# EAGLE board registerA (EAGLE 9.6.2)
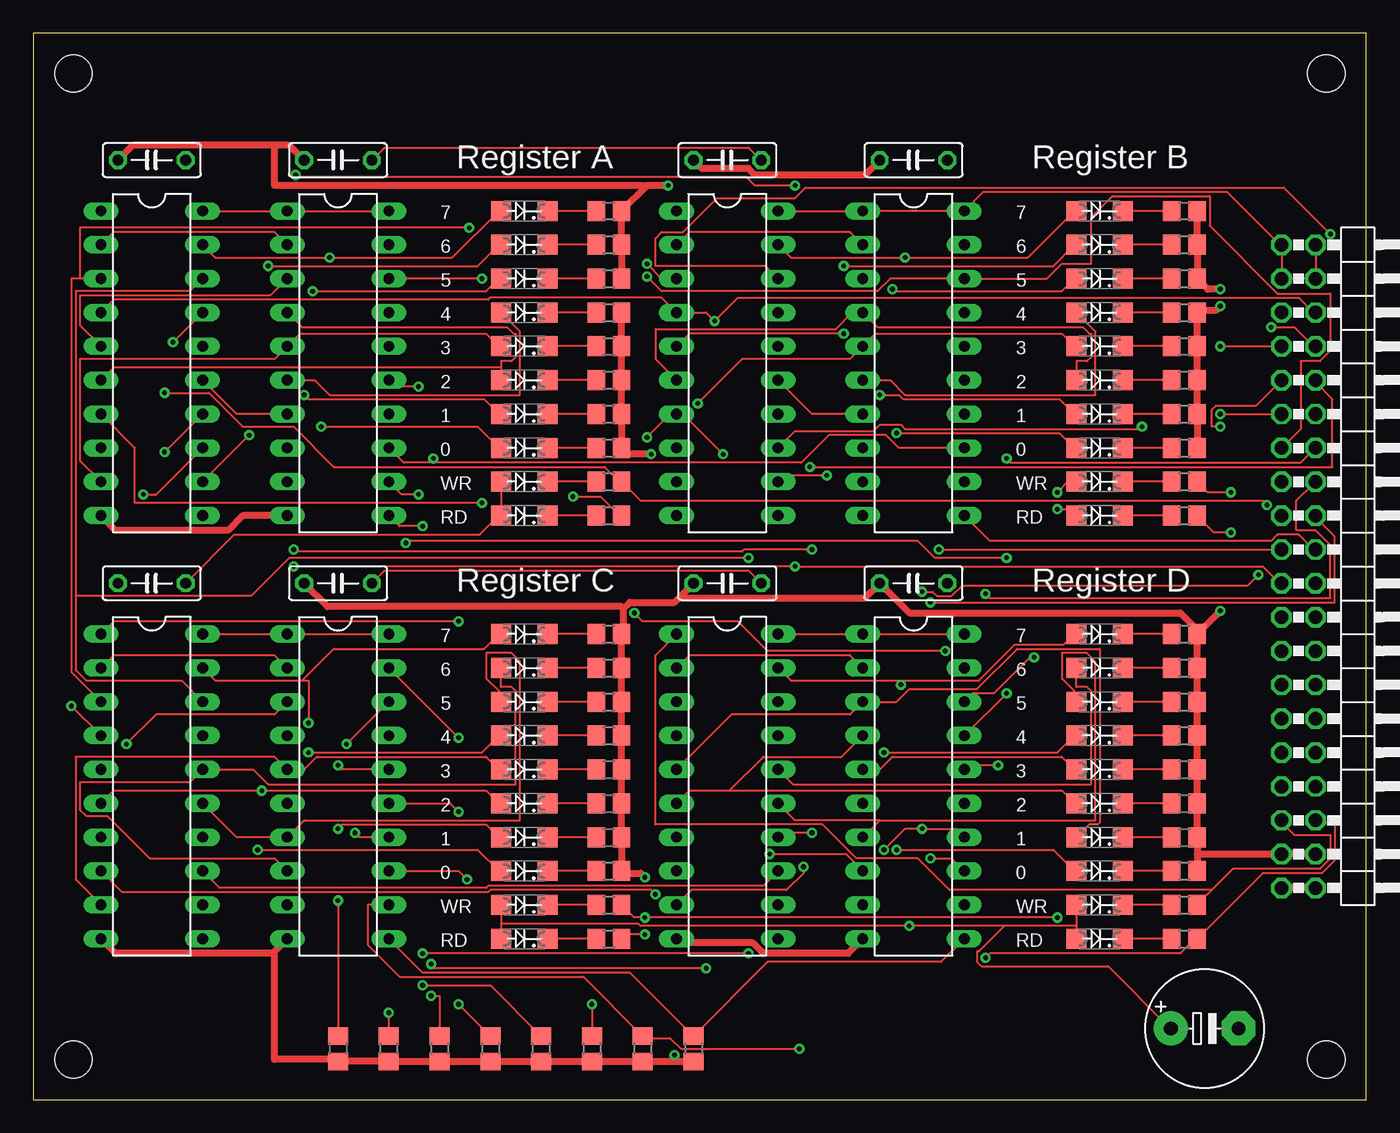
[diagram p0: board, top side]
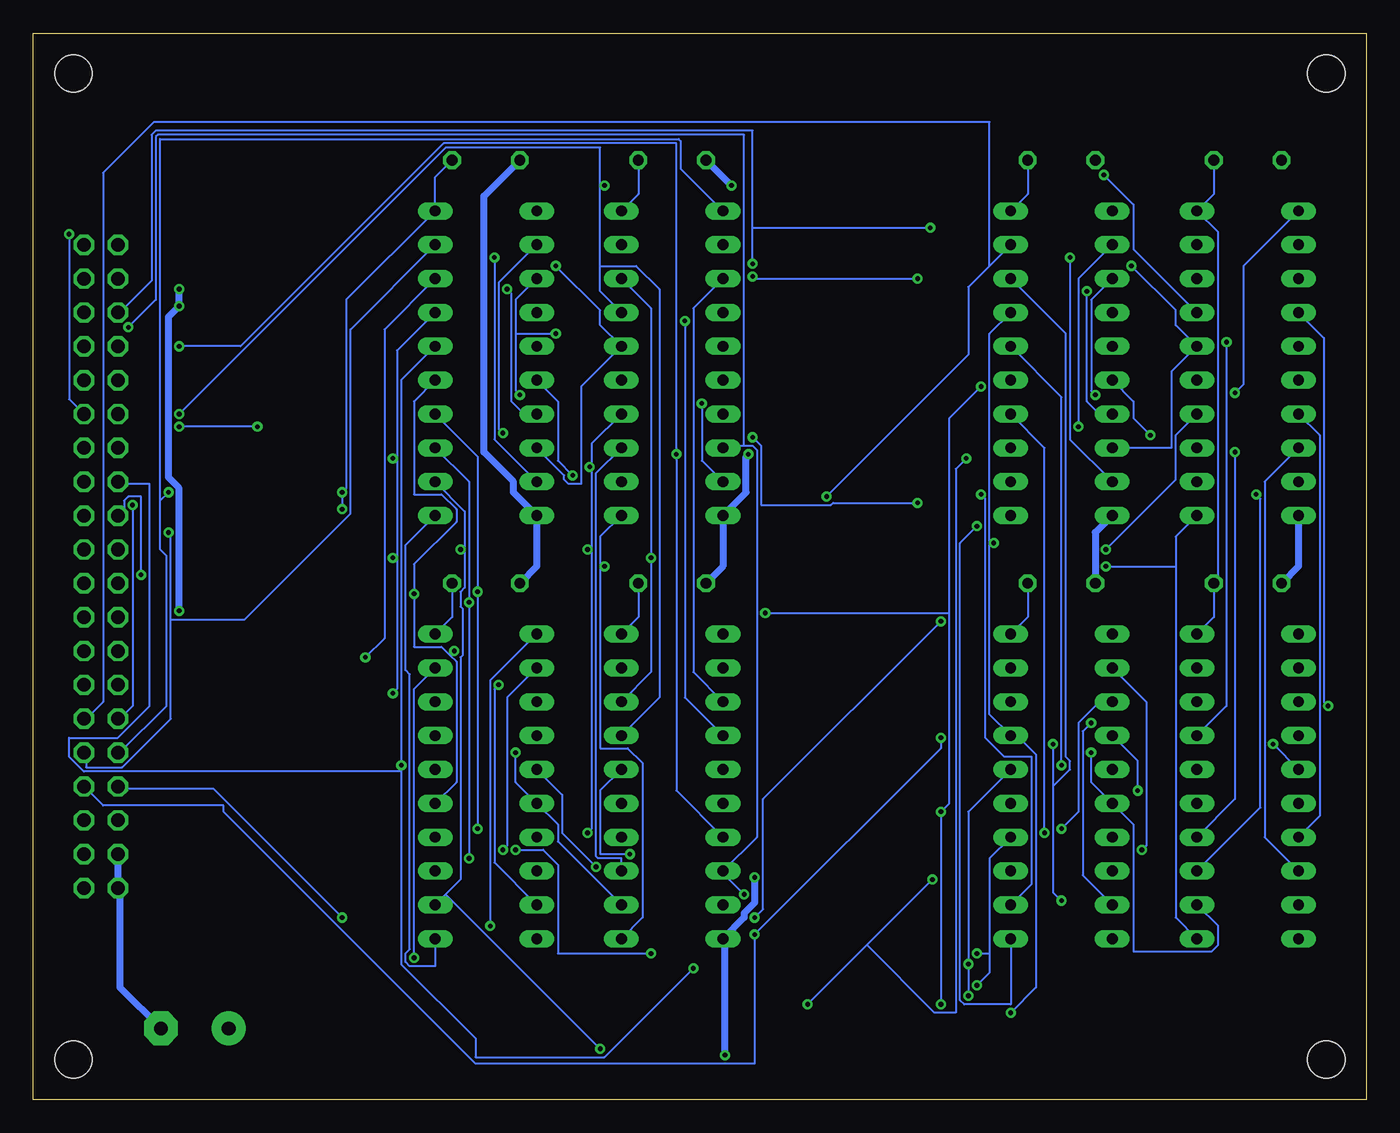
[diagram p1: board, bottom side, seen from below]

Size 100 x 80 mm. Coordinates in mm from the lower left corner, seen from the top.
Outline: 0,0 100,0 100,80 0,80 0,0
Copper layers (1*16): Top 0.035mm / dielectric 1.5mm / Bottom 0.035mm
Design rules "default": minimum track width 6mil, minimum drill 0.35mm, track to track 6mil, track to pad 6mil, pad to pad 6mil, via to via 6mil, smd to smd 6mil, copper to edge 40mil, drill to drill 6mil, minimum pad ring 10mil, minimum via ring 8mil, stop-mask expansion 4mil, vias tented up to drill 0mil, thermal gap 10mil
Net classes: 1 supply: width 0.508 mm
Holes 2.8 mm at 3,3 97,3 3,77 97,77
vRestrict: area 30.5,48 to 31.5,67.3; area 30.2,42.9 to 33,47; area 34,42.7 to 39.6,67.8; area 40.9,42.7 to 45.5,67.8; area 77.2,42.7 to 82.8,67.8; area 84.1,42.7 to 88.6,67.8; area 73.7,48 to 74.7,67.3; area 73.4,42.9 to 76.2,47; area 73.7,16.3 to 74.7,35.6; area 73.4,11.2 to 76.2,15.2; area 30.5,16.3 to 31.5,35.6; area 30.2,11.2 to 33,15.2; 12 more areas

## Footprints (pad centres in the part's own frame; a part is rotated, then mirrored left to right if it is on the bottom)
DIL20 = drill 0.813 long: 1 -11.43,-3.81; 2 -8.89,-3.81; 3 -6.35,-3.81; 4 -3.81,-3.81; 5 -1.27,-3.81; 6 1.27,-3.81; 7 3.81,-3.81; 8 6.35,-3.81; 9 8.89,-3.81; 10 11.43,-3.81; 11 11.43,3.81; 12 8.89,3.81; 13 6.35,3.81; 14 3.81,3.81; 15 1.27,3.81; 16 -1.27,3.81; 17 -3.81,3.81; 18 -6.35,3.81; 19 -8.89,3.81; 20 -11.43,3.81
E5-8,5 = drill 1.016 pad 2.54: + -2.54,0 | drill 1.016 pad 2.54 octagon: - 2.54,0
C050-025X075 = drill 0.813 octagon: 1 -2.54,0; 2 2.54,0
2X20/90 = drill 1.016 octagon: 1 -24.13,-6.35; 2 -24.13,-3.81; 3 -21.59,-6.35; 4 -21.59,-3.81; 5 -19.05,-6.35; 6 -19.05,-3.81; 7 -16.51,-6.35; 8 -16.51,-3.81; 9 -13.97,-6.35; 10 -13.97,-3.81; 11 -11.43,-6.35; 12 -11.43,-3.81; 13 -8.89,-6.35; 14 -8.89,-3.81; 15 -6.35,-6.35; 16 -6.35,-3.81; 17 -3.81,-6.35; 18 -3.81,-3.81; 19 -1.27,-6.35; 20 -1.27,-3.81; 21 1.27,-6.35; 22 1.27,-3.81; 23 3.81,-6.35; 24 3.81,-3.81; 25 6.35,-6.35; 26 6.35,-3.81; 27 8.89,-6.35; 28 8.89,-3.81; 29 11.43,-6.35; 30 11.43,-3.81; 31 13.97,-6.35; 32 13.97,-3.81; 33 16.51,-6.35; 34 16.51,-3.81; 35 19.05,-6.35; 36 19.05,-3.81; 37 21.59,-6.35; 38 21.59,-3.81; 39 24.13,-6.35; 40 24.13,-3.81
SML1206 = smd 1.5 x 1.5: A 1.75,0; C -1.75,0
R0805 = smd 1.3 x 1.5: 1 -0.95,0; 2 0.95,0

## Placement (x,y rotation side)
BUFF_A  74LS245N  [DIL20]  22.86,55.24 270 top
BUFF_B  74LS245N  [DIL20]  66.04,55.24 270 top
BUFF_C  74LS245N  [DIL20]  22.86,23.5 270 top
BUFF_D  74LS245N  [DIL20]  66.04,23.5 270 top
C1  10u  [E5-8,5]  87.88,5.33 0 top
C2  10n  [C050-025X075]  8.89,70.48 180 top
C3  10n  [C050-025X075]  22.86,38.73 180 top
C4  10n  [C050-025X075]  52.07,38.73 180 top
C5  10n  [C050-025X075]  66.04,38.73 180 top
C6  10n  [C050-025X075]  22.86,70.48 180 top
C7  10n  [C050-025X075]  8.89,38.73 180 top
C8  10n  [C050-025X075]  52.07,70.48 180 top
C9  10n  [C050-025X075]  66.04,70.48 180 top
JP1  [2X20/90]  100,40 270 top
LED1  green  [SML1206]  36.83,48.9 180 top
LED2  green  [SML1206]  36.83,51.44 180 top
LED3  green  [SML1206]  36.83,53.98 180 top
LED4  green  [SML1206]  36.83,56.52 180 top
LED5  green  [SML1206]  36.83,59.05 180 top
LED6  green  [SML1206]  36.83,61.59 180 top
LED7  green  [SML1206]  36.83,64.14 180 top
LED8  green  [SML1206]  36.83,66.67 180 top
LED9  green  [SML1206]  80.01,48.9 180 top
LED10  green  [SML1206]  80.01,51.44 180 top
LED11  green  [SML1206]  80.01,53.98 180 top
LED12  green  [SML1206]  80.01,56.52 180 top
LED13  green  [SML1206]  80.01,59.05 180 top
LED14  green  [SML1206]  80.01,61.59 180 top
LED15  green  [SML1206]  80.01,64.14 180 top
LED16  green  [SML1206]  80.01,66.67 180 top
LED17  green  [SML1206]  36.83,17.14 180 top
LED18  green  [SML1206]  36.83,19.68 180 top
LED19  green  [SML1206]  36.83,22.23 180 top
LED20  green  [SML1206]  36.83,24.77 180 top
LED21  green  [SML1206]  36.83,27.3 180 top
LED22  green  [SML1206]  36.83,29.84 180 top
LED23  green  [SML1206]  36.83,32.38 180 top
LED24  green  [SML1206]  36.83,34.92 180 top
LED25  green  [SML1206]  80.01,17.14 180 top
LED26  green  [SML1206]  80.01,19.68 180 top
LED27  green  [SML1206]  80.01,22.23 180 top
LED28  green  [SML1206]  80.01,24.77 180 top
LED29  green  [SML1206]  80.01,27.3 180 top
LED30  green  [SML1206]  80.01,29.84 180 top
LED31  green  [SML1206]  80.01,32.38 180 top
LED32  green  [SML1206]  80.01,34.92 180 top
R1  330  [R0805]  43.18,48.9 0 top
R2  330  [R0805]  43.18,51.44 0 top
R3  330  [R0805]  43.18,53.98 0 top
R4  330  [R0805]  43.18,56.52 0 top
R5  330  [R0805]  43.18,59.05 0 top
R6  330  [R0805]  43.18,61.59 0 top
R7  330  [R0805]  43.18,64.14 0 top
R8  330  [R0805]  43.18,66.67 0 top
R9  330  [R0805]  86.36,48.9 0 top
R10  330  [R0805]  86.36,51.44 0 top
R11  330  [R0805]  86.36,53.98 0 top
R12  330  [R0805]  86.36,56.52 0 top
R13  330  [R0805]  86.36,59.05 0 top
R14  330  [R0805]  86.36,61.59 0 top
R15  330  [R0805]  86.36,64.14 0 top
R16  330  [R0805]  86.36,66.67 0 top
R17  330  [R0805]  43.18,17.14 0 top
R18  330  [R0805]  43.18,19.68 0 top
R19  330  [R0805]  43.18,22.23 0 top
R20  330  [R0805]  43.18,24.77 0 top
R21  330  [R0805]  43.18,27.3 0 top
R22  330  [R0805]  43.18,29.84 0 top
R23  330  [R0805]  43.18,32.38 0 top
R24  330  [R0805]  43.18,34.92 0 top
R25  330  [R0805]  86.36,17.14 0 top
R26  330  [R0805]  86.36,19.68 0 top
R27  330  [R0805]  86.36,22.23 0 top
R28  330  [R0805]  86.36,24.77 0 top
R29  330  [R0805]  86.36,27.3 0 top
R30  330  [R0805]  86.36,29.84 0 top
R31  330  [R0805]  86.36,32.38 0 top
R32  330  [R0805]  86.36,34.92 0 top
R33  330  [R0805]  43.18,46.35 0 top
R34  330  [R0805]  43.18,43.81 0 top
R35  330  [R0805]  86.36,46.35 0 top
R36  330  [R0805]  86.36,43.81 0 top
R37  330  [R0805]  43.18,14.61 0 top
R38  330  [R0805]  43.18,12.06 0 top
R39  330  [R0805]  86.36,14.61 0 top
R40  330  [R0805]  86.36,12.06 0 top
R41  330  [R0805]  22.86,3.81 270 top
R42  330  [R0805]  26.67,3.81 270 top
R43  330  [R0805]  30.48,3.81 270 top
R44  330  [R0805]  34.29,3.81 270 top
R45  330  [R0805]  38.1,3.81 270 top
R46  330  [R0805]  41.91,3.81 270 top
R47  330  [R0805]  45.72,3.81 270 top
R48  330  [R0805]  49.53,3.81 270 top
RD_A  red  [SML1206]  36.83,43.81 180 top
RD_B  red  [SML1206]  80.01,43.81 180 top
RD_C  red  [SML1206]  36.83,12.06 180 top
RD_D  red  [SML1206]  80.01,12.06 180 top
REG_A  74LS377N  [DIL20]  8.89,55.24 270 top
REG_B  74LS377N  [DIL20]  52.07,55.24 270 top
REG_C  74LS377N  [DIL20]  8.89,23.5 270 top
REG_D  74LS377N  [DIL20]  52.07,23.5 270 top
WR_A  red  [SML1206]  36.83,46.35 180 top
WR_B  red  [SML1206]  80.01,46.35 180 top
WR_C  red  [SML1206]  36.83,14.61 180 top
WR_D  red  [SML1206]  80.01,14.61 180 top

## Library data of the parts
BUFF_A BUFF_B BUFF_C BUFF_D REG_A REG_B REG_C REG_D = 74xx-eu
C1-C9 = rcl; SPICEPREFIX: C
JP1 = pinhead
LED1-LED32 RD_A RD_B RD_C RD_D WR_A WR_B WR_C WR_D = led
R1-R48 = rcl; SPICEPREFIX: R

## Nets
!RDA: BUFF_A.19 JP1.30 R34.2
!RDB: BUFF_B.19 JP1.32 R36.2
!RDC: BUFF_C.19 JP1.34 R38.2
!RDD: BUFF_D.19 JP1.36 R40.2
!WRA: JP1.29 R33.2 REG_A.1
!WRB: JP1.31 R35.2 REG_B.1
!WRC: JP1.33 R37.2 REG_C.1
!WRD: JP1.35 R39.2 REG_D.1
A0: BUFF_A.2 LED1.A REG_A.2
A1: BUFF_A.3 LED2.A REG_A.5
A2: BUFF_A.4 LED3.A REG_A.6
A3: BUFF_A.5 LED4.A REG_A.9
A4: BUFF_A.6 LED5.A REG_A.12
A5: BUFF_A.7 LED6.A REG_A.15
A6: BUFF_A.8 LED7.A REG_A.16
A7: BUFF_A.9 LED8.A REG_A.19
B0: BUFF_B.2 LED9.A REG_B.2
B1: BUFF_B.3 LED10.A REG_B.5
B2: BUFF_B.4 LED11.A REG_B.6
B3: BUFF_B.5 LED12.A REG_B.9
B4: BUFF_B.6 LED13.A REG_B.12
B5: BUFF_B.7 LED14.A REG_B.15
B6: BUFF_B.8 LED15.A REG_B.16
B7: BUFF_B.9 LED16.A REG_B.19
BUS0: JP1.5 REG_A.3 REG_B.3 REG_C.3 REG_D.3
BUS1: JP1.6 REG_A.4 REG_B.4 REG_C.4 REG_D.4
BUS2: JP1.7 REG_A.7 REG_B.7 REG_C.7 REG_D.7
BUS3: JP1.8 REG_A.8 REG_B.8 REG_C.8 REG_D.8
BUS4: JP1.9 REG_A.13 REG_B.13 REG_C.13 REG_D.13
BUS5: JP1.10 REG_A.14 REG_B.14 REG_C.14 REG_D.14
BUS6: JP1.11 REG_A.17 REG_B.17 REG_C.17 REG_D.17
BUS7: JP1.12 REG_A.18 REG_B.18 REG_C.18 REG_D.18
C0: BUFF_C.2 LED17.A REG_C.2
C1: BUFF_C.3 LED18.A REG_C.5
C2: BUFF_C.4 LED19.A REG_C.6
C3: BUFF_C.5 LED20.A REG_C.9
C4: BUFF_C.6 LED21.A REG_C.12
C5: BUFF_C.7 LED22.A REG_C.15
C6: BUFF_C.8 LED23.A REG_C.16
C7: BUFF_C.9 LED24.A REG_C.19
CLK: JP1.21 REG_A.11 REG_B.11 REG_C.11 REG_D.11
D0: BUFF_D.2 LED25.A REG_D.2
D1: BUFF_D.3 LED26.A REG_D.5
D2: BUFF_D.4 LED27.A REG_D.6
D3: BUFF_D.5 LED28.A REG_D.9
D4: BUFF_D.6 LED29.A REG_D.12
D5: BUFF_D.7 LED30.A REG_D.15
D6: BUFF_D.8 LED31.A REG_D.16
D7: BUFF_D.9 LED32.A REG_D.19
GND [supply]: BUFF_A.10 BUFF_B.10 BUFF_C.10 BUFF_D.10 C1.- C2.2 C3.2 C4.2 C5.2 C6.2 C7.2 C8.2 C9.2 JP1.37 JP1.38 JP1.39 JP1.40 R1.2 R2.2 R3.2 R4.2 R5.2 R6.2 R7.2 R8.2 R9.2 R10.2 R11.2 R12.2 R13.2 R14.2 R15.2 R16.2 R17.2 R18.2 R19.2 R20.2 R21.2 R22.2 R23.2 R24.2 R25.2 R26.2 R27.2 R28.2 R29.2 R30.2 R31.2 R32.2 R41.2 R42.2 R43.2 R44.2 R45.2 R46.2 R47.2 R48.2 REG_A.10 REG_B.10 REG_C.10 REG_D.10
ICLK: JP1.22
N$1: LED1.C R1.1
N$2: LED2.C R2.1
N$3: LED3.C R3.1
N$4: LED4.C R4.1
N$5: LED5.C R5.1
N$6: LED6.C R6.1
N$7: LED7.C R7.1
N$8: LED8.C R8.1
N$10: LED9.C R9.1
N$11: LED10.C R10.1
N$12: LED11.C R11.1
N$13: LED12.C R12.1
N$14: LED13.C R13.1
N$15: LED14.C R14.1
N$16: LED15.C R15.1
N$17: LED16.C R16.1
N$19: LED17.C R17.1
N$20: LED18.C R18.1
N$21: LED19.C R19.1
N$22: LED20.C R20.1
N$23: LED21.C R21.1
N$24: LED22.C R22.1
N$25: LED23.C R23.1
N$26: LED24.C R24.1
N$28: LED25.C R25.1
N$29: LED26.C R26.1
N$30: LED27.C R27.1
N$31: LED28.C R28.1
N$32: LED29.C R29.1
N$33: LED30.C R30.1
N$34: LED31.C R31.1
N$35: LED32.C R32.1
N$37: R33.1 WR_A.C
N$38: R34.1 RD_A.C
N$39: R35.1 WR_B.C
N$40: R36.1 RD_B.C
N$41: R37.1 WR_C.C
N$42: R38.1 RD_C.C
N$43: R39.1 WR_D.C
N$44: R40.1 RD_D.C
VCC: BUFF_A.1 BUFF_A.20 BUFF_B.1 BUFF_B.20 BUFF_C.1 BUFF_C.20 BUFF_D.1 BUFF_D.20 C1.+ C2.1 C3.1 C4.1 C5.1 C6.1 C7.1 C8.1 C9.1 JP1.1 JP1.2 JP1.3 JP1.4 RD_A.A RD_B.A RD_C.A RD_D.A REG_A.20 REG_B.20 REG_C.20 REG_D.20 WR_A.A WR_B.A WR_C.A WR_D.A
X0: BUFF_A.18 BUFF_B.18 BUFF_C.18 BUFF_D.18 JP1.13 R41.1
X1: BUFF_A.17 BUFF_B.17 BUFF_C.17 BUFF_D.17 JP1.14 R42.1
X2: BUFF_A.16 BUFF_B.16 BUFF_C.16 BUFF_D.16 JP1.15 R43.1
X3: BUFF_A.15 BUFF_B.15 BUFF_C.15 BUFF_D.15 JP1.16 R44.1
X4: BUFF_A.14 BUFF_B.14 BUFF_C.14 BUFF_D.14 JP1.17 R45.1
X5: BUFF_A.13 BUFF_B.13 BUFF_C.13 BUFF_D.13 JP1.18 R46.1
X6: BUFF_A.12 BUFF_B.12 BUFF_C.12 BUFF_D.12 JP1.19 R47.1
X7: BUFF_A.11 BUFF_B.11 BUFF_C.11 BUFF_D.11 JP1.20 R48.1

## Tracks (layer width: path | path; a pad name or v marks a point on that pad's centre or on a via)
!RDA  (via drill 0.35)
  Top 0.152: v40.48,45.24 42.55,45.24 43.97,43.81 R34.2
  Bottom 0.152: v40.48,45.24 29.84,55.88 29.84,60.96 28.26,62.55 | BUFF_A.19 28.26,62.55 | 28.26,62.55 28.26,73.34 90.96,73.34 94.77,69.53 94.77,29.84 96.04,28.57 JP1.30
!RDB  (via drill 0.35)
  Top 0.152: v89.85,42.55 88.58,42.55 R36.2
  Bottom 0.152: v89.85,42.55 89.69,42.39 89.69,36.04 | 89.69,36.04 89.69,28.57 93.34,24.92 96.04,24.92 96.04,25.88 JP1.32 | BUFF_B.19 76.2,57.78 76.2,43.97 84.14,36.04 89.69,36.04
!RDC  (via drill 0.35)
  Top 0.152: v45.88,12.38 44.45,12.38 R38.2 | BUFF_C.19 v31.91,27.15
  Bottom 0.152: v31.91,27.15 31.91,26.35 v45.88,12.38 45.88,2.7 66.83,2.7 85.72,21.59 85.72,22.07 94.77,22.07 96.04,23.34 JP1.34
!RDD  (via drill 0.35)
  Top 0.152: JP1.36 96.2,20.8 97.63,20.8 97.63,17.94 96.68,16.99 92.23,16.99 R40.2 87.15,12.06 86.04,10.95 71.75,10.95 v71.44,10.64
  Bottom 0.152: BUFF_D.19 71.44,30.8 v71.44,10.64
!WRA  (via drill 0.35)
  Top 0.152: v9.84,53.02 13.18,53.02 15.72,50.48 19.53,50.48 22.54,47.47 42.86,47.47 43.97,46.35 R33.2 45.56,44.93 92.23,44.93 v92.55,44.61
  Bottom 0.152: v9.84,53.02 9.21,53.66 9.21,62.55 REG_A.1 | v92.55,44.61 92.55,29.53 93.5,28.57 JP1.29
!WRB  (via drill 0.35)
  Top 0.152: v89.85,45.56 88.11,45.56 R35.2
  Bottom 0.152: 90.49,44.93 v89.85,45.56 | 90.49,44.93 90.49,41.27 90.01,40.8 90.01,29.53 93.5,26.04 JP1.31 | REG_B.1 51.44,69.85 51.44,71.91 51.59,72.07 90.49,72.07 90.49,44.93
!WRC  (via drill 0.35)
  Top 0.152: v76.83,13.65 v45.88,13.65 45.09,13.65 R37.2 | REG_C.1 6.03,35.88 v31.91,35.88
  Bottom 0.152: v76.83,13.65 86.52,23.34 93.5,23.34 JP1.33 | v31.91,35.88 45.24,22.54 45.24,14.29 v45.88,13.65
!WRD
  Top 0.152: 88.42,15.72 90.01,17.3 96.52,17.3 97.31,18.1 97.31,19.84 94.61,19.84 93.66,20.8 JP1.35 | 88.42,15.72 R39.2 | REG_D.1 46.67,33.34 46.67,20.64 59.21,20.64 61.75,18.1 66.36,18.1 68.74,15.72 88.42,15.72
A0  (via drill 0.35)
  Top 0.152: v21.59,50.48 33.34,50.48 34.92,48.9 LED1.A | REG_A.2 6.03,65.09 18.1,65.09 BUFF_A.2
  Bottom 0.152: v21.59,50.48 21.59,61.59 BUFF_A.2
A1  (via drill 0.35)
  Top 0.152: v20.32,52.86 20.64,52.55 33.81,52.55 34.92,51.44 LED2.A | REG_A.5 3.49,58.1 3.49,60.33 17.78,60.33 BUFF_A.3
  Bottom 0.152: v20.32,52.86 20.64,53.18 20.64,60.01 BUFF_A.3
A2
  Top 0.152: 35.08,54.93 35.08,55.4 35.88,55.4 36.2,55.72 36.2,57.47 36.04,57.47 35.56,57.94 20.16,57.94 BUFF_A.4 | 35.08,54.93 LED3.A | REG_A.6 6.03,54.93 35.08,54.93
A3
  Top 0.152: LED4.A 34.92,56.52 33.97,57.47 20,57.47 BUFF_A.5 18.1,55.56 3.49,55.56 3.49,47.94 REG_A.9
A4  (via drill 0.35)
  Top 0.152: BUFF_A.6 21.11,53.98 22.23,52.86 36.51,52.86 36.51,57.63 LED5.A | v16.19,49.85 REG_A.12
  Bottom 0.152: v16.19,49.85 17.46,51.12 17.46,52.39 BUFF_A.6
A5  (via drill 0.35)
  Top 0.152: v20.95,60.64 33.97,60.64 34.92,61.59 LED6.A | REG_A.15 15.24,51.44 BUFF_A.7
  Bottom 0.152: v20.95,60.64 20.95,52.39 20,51.44 BUFF_A.7
A6  (via drill 0.35)
  Top 0.152: v17.62,62.55 33.34,62.55 34.92,64.14 LED7.A
  Bottom 0.152: v17.62,62.55 14.29,59.21 14.29,58.1 REG_A.16 14.61,54.61 14.61,48.9 BUFF_A.8
A7  (via drill 0.35)
  Top 0.152: REG_A.19 13.65,63.18 v22.23,63.18 31.43,63.18 34.92,66.67 LED8.A
  Bottom 0.152: BUFF_A.9 22.23,49.53 v22.23,63.18
B0  (via drill 0.35)
  Top 0.152: v64.77,50.01 76.99,50.01 78.11,48.9 LED9.A | REG_B.2 49.21,65.09 61.28,65.09 BUFF_B.2
  Bottom 0.152: v64.77,50.01 65.09,50.32 65.09,61.28 BUFF_B.2
B1  (via drill 0.35)
  Top 0.152: v63.5,52.86 64.93,52.86 65.25,52.55 76.99,52.55 78.11,51.44 LED10.A | REG_B.5 49.21,57.47 v60.8,57.47
  Bottom 0.152: v63.5,52.86 63.82,53.18 63.82,57.47 | 63.82,57.47 63.82,60.01 BUFF_B.3 | 63.82,57.47 v60.8,57.47
B2
  Top 0.152: LED11.A 78.26,55.4 79.06,55.4 79.38,55.72 79.38,57.47 79.22,57.47 78.74,57.94 63.34,57.94 BUFF_B.4 61.44,59.05 60.17,57.78 46.67,57.78 46.67,55.56 REG_B.6
B3  (via drill 0.35)
  Top 0.152: LED12.A 78.11,56.52 77.15,57.47 63.18,57.47 BUFF_B.5 61.28,55.56 53.18,55.56 v49.85,52.23
  Bottom 0.152: REG_B.9 49.85,47.94 v49.85,52.23
B4  (via drill 0.35)
  Top 0.152: BUFF_B.6 64.29,53.98 65.41,52.86 79.69,52.86 79.69,57.63 LED13.A | REG_B.12 56.36,46.83 v59.53,46.83
  Bottom 0.152: v59.53,46.83 60.64,47.94 60.64,52.39 BUFF_B.6
B5  (via drill 0.35)
  Top 0.152: v64.45,60.8 64.61,60.64 77.15,60.64 78.11,61.59 LED14.A | REG_B.15 58.42,51.44 BUFF_B.7
  Bottom 0.152: v64.45,60.8 64.14,60.48 64.14,52.39 63.18,51.44 BUFF_B.7
B6  (via drill 0.35)
  Top 0.152: v60.8,62.55 76.52,62.55 78.11,64.14 LED15.A
  Bottom 0.152: v60.8,62.55 57.47,59.21 57.47,58.1 REG_B.16 58.9,53.5 58.9,46.2 59.85,46.2 60.17,46.51 60.17,46.83 BUFF_B.8
B7  (via drill 0.35)
  Top 0.152: REG_B.19 56.83,63.18 v65.41,63.18 74.61,63.18 78.11,66.67 LED16.A
  Bottom 0.152: BUFF_B.9 65.41,49.53 v65.41,63.18
BUS0  (via drill 0.35)
  Top 0.152: REG_C.3 2.86,32.07 2.86,61.59 3.49,61.59 | REG_A.3 3.49,61.59 | v46.04,62.71 47.15,61.59 REG_B.3 | 3.49,61.59 3.49,65.41 v32.7,65.41
  Bottom 0.152: REG_D.3 50.48,32.07 50.48,59.37 REG_B.3 | v46.04,62.71 46.04,65.41 | 46.04,65.41 46.04,72.71 90.81,72.71 91.12,72.39 91.12,61.44 93.5,59.05 JP1.5 | 46.04,65.41 v32.7,65.41
BUS1  (via drill 0.35)
  Top 0.152: v2.86,29.53 REG_C.4 | JP1.6 96.04,59.05 94.93,60.17 52.86,60.17 v51.12,58.42 50.48,59.05 REG_B.4 47.15,60.17 34.29,60.17 34.13,60.01 6.03,60.01 REG_A.4
  Bottom 0.152: v2.86,29.53 3.17,29.84 3.17,57.15 REG_A.4 | REG_D.4 51.12,30.16 v51.12,58.42
BUS2  (via drill 0.35)
  Top 0.152: v51.75,48.42 48.74,51.44 REG_B.7 47.78,51.44 v46.04,49.69 | v89.06,56.52 93.5,56.52 JP1.7 | REG_A.7 7.62,48.9 7.62,44.77 v33.66,44.77
  Bottom 0.152: REG_C.7 3.49,21.27 3.49,49.85 REG_A.7 | REG_D.7 51.75,23.18 v51.75,48.42 51.75,71.75 69.22,71.75 84.45,56.52 v89.06,56.52 | v33.66,44.77 40.01,44.77 40.16,44.61 45.4,44.61 45.4,49.05 v46.04,49.69
BUS3  (via drill 0.35)
  Top 0.152: v92.87,57.94 94.61,57.94 96.04,56.52 JP1.8 | REG_C.8 6.67,15.56 34.13,15.56 34.29,15.72 46.35,15.72 v46.67,15.4
  Bottom 0.152: REG_C.8 7.62,19.68 7.62,46.35 REG_A.8 | 46.67,49.05 48.26,49.05 REG_B.8 | 46.67,49.05 46.04,49.05 45.72,48.74 45.72,19.68 REG_D.8 48.26,16.99 v46.67,15.4 | v92.87,57.94 90.81,60.01 90.81,72.23 90.65,72.39 46.67,72.39 46.67,49.05
BUS4  (via drill 0.35)
  Top 0.152: REG_C.13 13.97,15.88 33.97,15.88 34.13,16.03 54.77,16.03 REG_D.13 | REG_A.13 9.21,45.4 v8.26,45.4 | v89.06,50.48 88.42,50.48 88.42,51.75 88.74,52.07 91.76,52.07 93.5,53.82 JP1.9 | v83.19,50.48 83.03,50.32 65.41,50.32 65.09,50.64 63.5,50.64 63.02,50.16 57.15,50.16 REG_B.13
  Bottom 0.152: v8.26,45.4 7.94,45.09 7.94,21.91 REG_C.13 | REG_B.13 57.78,46.99 57.78,18.26 57.63,18.1 55.88,18.1 REG_D.13 | v83.19,50.48 v89.06,50.48
BUS5  (via drill 0.35)
  Top 0.152: REG_A.14 v9.84,48.58 | REG_D.14 56.2,20 v58.42,20 | v58.26,47.47 97.47,47.47 97.47,52.55 96.2,53.82 JP1.10 | v19.53,41.27 19.68,41.12 53.18,41.12 53.34,41.27 v58.42,41.27
  Bottom 0.152: REG_C.14 9.84,22.54 v9.84,48.58 | v58.42,20 58.1,20.32 58.1,41.27 | 58.1,47.47 58.1,49.21 REG_B.14 | 58.1,47.47 58.1,41.27 | 58.1,47.47 v58.26,47.47 | REG_A.14 14.29,49.85 14.29,46.51 v19.53,41.27 | 58.1,41.27 v58.42,41.27
BUS6  (via drill 0.35)
  Top 0.152: REG_A.17 v10.48,56.83 | v89.06,51.44 93.5,51.44 JP1.11 | v19.68,69.37 19.84,69.22 53.5,69.22 54.13,68.58 v57.15,68.58
  Bottom 0.152: REG_C.17 10.48,29.53 v10.48,56.83 | REG_D.17 53.02,30.16 53.02,60.8 54.77,62.55 57.47,62.55 | 57.47,62.55 57.47,60.64 REG_B.17 | v89.06,51.44 69.06,71.44 57.47,71.44 57.47,68.58 | 57.47,62.55 57.47,68.58 | REG_A.17 17.46,63.82 17.46,67.15 v19.68,69.37 | 57.47,68.58 v57.15,68.58
BUS7  (via drill 0.35)
  Top 0.152: REG_C.18 11.11,31.43 3.97,31.43 3.17,32.23 3.17,37.78 | 3.17,37.78 3.17,60.64 11.75,60.64 REG_A.18 | v97.31,64.93 93.82,68.42 57.94,68.42 57.15,67.63 51.28,67.63 48.74,65.09 47.15,65.09 46.67,64.61 46.67,62.55 54.93,62.55 REG_B.18 | 3.17,37.78 16.35,37.78 19.21,40.64 v53.66,40.64
  Bottom 0.152: REG_D.18 53.66,32.07 v53.66,40.64 53.66,59.37 REG_B.18 | v97.31,64.93 97.31,52.55 96.2,51.44 JP1.12
C0  (via drill 0.35)
  Top 0.152: v16.83,18.73 33.34,18.73 34.92,17.14 LED17.A | REG_C.2 6.03,33.34 18.1,33.34 BUFF_C.2
  Bottom 0.152: v16.83,18.73 16.51,19.05 16.51,29.84 BUFF_C.2
C1  (via drill 0.35)
  Top 0.152: v22.86,20.32 23.18,20.64 33.97,20.64 34.92,19.68 LED18.A | v6.99,26.67 9.21,28.89 18.1,28.89 BUFF_C.3
  Bottom 0.152: v22.86,20.32 21.59,21.59 21.59,28.26 20,29.84 BUFF_C.3 | v6.99,26.67 REG_C.5
C2  (via drill 0.35)
  Top 0.152: REG_C.6 6.03,23.18 v17.14,23.18 33.97,23.18 34.92,22.23 LED19.A
  Bottom 0.152: BUFF_C.4 17.14,25.4 v17.14,23.18
C3
  Top 0.152: LED20.A 34.92,24.77 33.97,25.72 21.27,25.72 20.32,24.77 BUFF_C.5 18.1,25.72 3.17,25.72 3.17,16.51 REG_C.9
C4  (via drill 0.35)
  Top 0.152: v20.64,26.04 33.66,26.04 34.92,27.3 LED21.A
  Bottom 0.152: v20.64,26.04 20.64,23.81 BUFF_C.6 17.46,20.64 17.46,11.11 11.59,11.11 11.11,11.59 11.11,13.02 REG_C.12
C5
  Top 0.152: LED22.A 34.92,29.84 34.92,30.64 33.97,31.59 33.97,33.5 35.88,33.5 36.51,32.86 36.51,20.95 20.32,20.95 BUFF_C.7 15.24,19.68 REG_C.15
C6
  Top 0.152: LED23.A 35.08,30.96 35.88,30.96 36.2,30.64 36.2,23.65 17.62,23.65 16.51,24.77 REG_C.16 11.75,23.81 3.49,23.81 3.49,21.75 3.97,21.27 5.56,21.27 8.73,18.1 18.1,18.1 BUFF_C.8
C7  (via drill 0.35)
  Top 0.152: 20.16,31.43 22.54,33.81 33.81,33.81 34.92,34.92 LED24.A | 20.16,31.43 13.65,31.43 REG_C.19 | v20.64,28.26 20.64,31.43 20.16,31.43
  Bottom 0.152: BUFF_C.9 21.27,16.83 21.27,27.62 v20.64,28.26
CLK  (via drill 0.35)
  Top 0.152: JP1.21 93.5,38.73 92.23,40.01 v57.15,40.01 v19.53,40.01
  Bottom 0.152: REG_C.11 14.29,13.65 14.29,40.01 | 14.29,40.01 14.29,42.23 REG_A.11 | REG_D.11 54.29,13.65 54.29,25.24 55.4,26.35 57.47,26.35 57.47,40.01 | 57.47,40.01 57.47,42.23 REG_B.11 | 57.47,40.01 v57.15,40.01 | v19.53,40.01 14.29,40.01
D0  (via drill 0.35)
  Top 0.152: v64.77,18.73 76.52,18.73 78.11,17.14 LED25.A | REG_D.2 49.21,33.34 61.28,33.34 BUFF_D.2
  Bottom 0.152: v64.77,18.73 64.45,19.05 64.45,30.16 BUFF_D.2
D1
  Top 0.152: LED26.A 79.22,20.64 79.85,20.64 80.01,20.8 80.01,33.81 73.82,33.81 70.8,30.8 65.72,30.8 64.77,29.84 BUFF_D.3 61.28,28.89 52.39,28.89 REG_D.5
D2
  Top 0.152: 52.23,23.18 49.21,23.18 REG_D.6 | 52.23,23.18 77.15,23.18 78.11,22.23 LED27.A | BUFF_D.4 60.64,25.72 54.77,25.72 52.23,23.18
D3  (via drill 0.35)
  Top 0.152: BUFF_D.5 63.5,24.77 64.45,25.72 77.15,25.72 78.11,24.77 LED28.A | REG_D.9 49.37,15.72 56.52,15.72 57.78,16.99 v57.78,17.46
  Bottom 0.152: v57.78,17.46 60.33,20 60.33,22.86 BUFF_D.5
D4  (via drill 0.35)
  Top 0.152: v63.82,26.04 76.83,26.04 78.11,27.3 LED29.A
  Bottom 0.152: v63.82,26.04 63.82,23.81 BUFF_D.6 60.64,20.64 60.64,19.37 REG_D.12
D5
  Top 0.152: 63.5,20.95 79.69,20.95 79.69,32.86 79.06,33.5 77.15,33.5 77.15,31.59 78.11,30.64 78.11,29.84 LED30.A | BUFF_D.7 63.5,20.95 | REG_D.15 57.15,20.95 63.5,20.95
D6  (via drill 0.35)
  Top 0.152: REG_D.16 56.99,23.65 79.38,23.65 79.38,30.64 79.06,30.96 78.26,30.96 LED31.A | BUFF_D.8 60.96,18.41 v55.24,18.41
  Bottom 0.152: v55.24,18.41 57.47,18.41 57.47,23.18 REG_D.16
D7  (via drill 0.35)
  Top 0.152: 65.09,31.43 56.83,31.43 REG_D.19 | 65.09,31.43 70.96,31.43 73.66,34.13 77.31,34.13 78.11,34.92 LED32.A | 65.09,31.43 v65.09,31.11
  Bottom 0.152: BUFF_D.9 65.41,17.78 65.41,30.8 v65.09,31.11
GND  (via drill 0.35)
  Top 0.508: R16.2 87.31,64.29 R15.2 R14.2 87.47,61.44 88.11,60.8 v89.06,60.8 | R9.2 R10.2 87.31,51.59 R11.2 87.31,54.13 R12.2 87.31,56.67 R13.2 87.47,59.21 88.74,59.21 v89.06,59.53 | JP1.39 93.66,15.88 96.04,15.88 JP1.40 | JP1.38 96.04,18.41 93.66,18.41 JP1.37 93.5,18.41 87.31,18.41 | 87.31,18.41 R26.2 87.31,19.84 R27.2 87.31,22.38 R28.2 87.31,24.92 R29.2 87.31,27.46 R30.2 87.31,30 R31.2 87.31,32.54 R32.2 | 87.31,18.41 R25.2 | v89.06,36.67 87.47,35.08 R32.2 | REG_D.10 48.58,11.75 53.98,11.75 54.77,10.95 61.12,10.95 BUFF_D.10 | REG_C.10 6.19,10.95 17.94,10.95 | BUFF_C.10 17.94,10.95 | 48.1,2.86 45.88,2.86 R47.2 42.07,2.86 R46.2 38.26,2.86 R45.2 34.45,2.86 R44.2 30.64,2.86 R43.2 26.83,2.86 R42.2 R41.2 22.7,3.02 18.1,3.02 18.1,10.79 17.94,10.95 | 48.1,2.86 R48.2 | 48.1,2.86 v48.1,3.33 | C2.2 7.46,71.6 18.1,71.6 | 18.1,71.6 19.21,71.6 C6.2 | R6.2 R7.2 44.13,64.29 R8.2 44.29,66.83 45.88,68.42 | C8.2 50.16,69.85 53.66,69.85 54.13,69.37 62.39,69.37 C9.2 | 45.88,68.42 46.04,68.58 v47.62,68.58 | 18.1,71.6 18.1,68.58 45.72,68.58 45.88,68.42 | REG_A.10 6.19,42.7 14.61,42.7 15.72,43.81 BUFF_A.10 | R5.2 44.13,56.67 R4.2 44.13,54.13 R3.2 44.13,51.59 R2.2 R1.2 44.29,48.74 44.61,48.42 v46.35,48.42 | 48.58,37.78 48.1,37.31 44.77,37.31 44.29,36.83 | 48.58,37.78 C4.2 | 44.29,36.83 44.29,35.08 R24.2 44.13,32.54 R23.2 44.13,30 R22.2 44.13,27.46 R21.2 44.13,24.92 R20.2 44.13,22.38 R19.2 44.13,19.84 R18.2 R17.2 44.29,16.99 45.56,16.99 v45.88,16.67 | 48.58,37.78 48.74,37.62 62.39,37.62 C5.2 65.72,36.51 86.04,36.51 87.31,35.24 R32.2 | C3.2 22.07,36.99 44.13,36.99 44.29,36.83
  Bottom 0.508: v89.06,60.8 v89.06,59.53 89.85,58.74 89.85,46.67 89.06,45.88 v89.06,36.67 | JP1.37 93.66,18.26 93.66,15.88 JP1.39 93.5,15.72 93.5,8.41 C1.- | v48.1,3.33 48.1,11.91 REG_D.10 46.67,13.65 46.67,13.97 45.88,14.76 v45.88,16.67 | C8.2 v47.62,68.58 | C7.2 5.08,40.01 REG_A.10 | C3.2 20.32,42.55 BUFF_A.10 | C5.2 62.23,40.01 BUFF_B.10 63.98,45.56 63.98,46.35 66.2,48.58 66.2,67.79 C9.2 | C4.2 48.26,40.01 REG_B.10 46.51,45.56 46.51,48.26 v46.35,48.42
N$1
  Top 0.152: R1.1 LED1.C
N$2
  Top 0.152: R2.1 LED2.C
N$3
  Top 0.152: R3.1 LED3.C
N$4
  Top 0.152: R4.1 LED4.C
N$5
  Top 0.152: R5.1 LED5.C
N$6
  Top 0.152: R6.1 LED6.C
N$7
  Top 0.152: R7.1 LED7.C
N$8
  Top 0.152: R8.1 LED8.C
N$10
  Top 0.152: R9.1 LED9.C
N$11
  Top 0.152: R10.1 LED10.C
N$12
  Top 0.152: R11.1 LED11.C
N$13
  Top 0.152: R12.1 LED12.C
N$14
  Top 0.152: R13.1 LED13.C
N$15
  Top 0.152: R14.1 LED14.C
N$16
  Top 0.152: R15.1 LED15.C
N$17
  Top 0.152: R16.1 LED16.C
N$19
  Top 0.152: R17.1 LED17.C
N$20
  Top 0.152: R18.1 LED18.C
N$21
  Top 0.152: R19.1 LED19.C
N$22
  Top 0.152: R20.1 LED20.C
N$23
  Top 0.152: R21.1 LED21.C
N$24
  Top 0.152: R22.1 LED22.C
N$25
  Top 0.152: R23.1 LED23.C
N$26
  Top 0.152: R24.1 LED24.C
N$28
  Top 0.152: R25.1 LED25.C
N$29
  Top 0.152: R26.1 LED26.C
N$30
  Top 0.152: R27.1 LED27.C
N$31
  Top 0.152: R28.1 LED28.C
N$32
  Top 0.152: R29.1 LED29.C
N$33
  Top 0.152: R30.1 LED30.C
N$34
  Top 0.152: R31.1 LED31.C
N$35
  Top 0.152: R32.1 LED32.C
N$37
  Top 0.152: R33.1 WR_A.C
N$38
  Top 0.152: R34.1 RD_A.C
N$39
  Top 0.152: R35.1 WR_B.C
N$40
  Top 0.152: R36.1 RD_B.C
N$41
  Top 0.152: R37.1 WR_C.C
N$42
  Top 0.152: R38.1 RD_C.C
N$43
  Top 0.152: R39.1 WR_D.C
N$44
  Top 0.152: R40.1 RD_D.C
VCC  (via drill 0.35)
  Top 0.152: REG_B.20 BUFF_B.1 BUFF_B.20 71.28,68.1 89.53,68.1 93.5,64.14 JP1.1 93.66,63.98 93.66,61.59 | JP1.2 96.2,63.98 96.2,61.59 JP1.4 96.04,61.59 93.66,61.59 | 93.66,61.59 JP1.3 | v76.83,44.29 77.63,44.29 78.11,43.81 RD_B.A | v76.83,45.56 77.63,46.35 WR_B.A | 35.08,13.18 WR_C.A | 35.08,13.18 RD_C.A | 78.26,13.02 WR_D.A | 78.26,13.02 RD_D.A | 35.08,13.18 45.4,13.18 45.56,13.02 v65.72,13.02 72.87,13.02 | 78.26,13.02 72.87,13.02 | 72.87,13.02 70.96,11.11 70.8,11.11 70.8,10.32 71.12,10 80.64,10 85.25,5.4 C1.+ | REG_D.20 BUFF_D.1 BUFF_D.20 | REG_A.20 BUFF_A.1 BUFF_A.20 | WR_A.A RD_A.A 34.92,43.81 33.5,42.39 15.08,42.39 C7.1 | REG_C.20 BUFF_C.1 BUFF_C.20 | C4.1 53.66,39.69 26.35,39.69 C3.1 | C8.1 53.66,71.44 26.35,71.44 C6.1
  Bottom 0.152: REG_B.20 54.61,67.94 C8.1 | v76.83,44.29 v76.83,45.56 76.52,45.88 76.52,60.01 BUFF_B.20 69.85,69.22 C9.1 | BUFF_D.20 68.58,36.2 C5.1 | REG_D.20 54.61,36.2 C4.1 | BUFF_A.20 25.4,67.94 C6.1 | C2.1 11.43,67.94 REG_A.20 11.11,65.09 11.11,39.05 C7.1 11.43,36.2 REG_C.20 | BUFF_C.20 25.4,36.2 C3.1 | v65.72,13.02 65.72,31.43 BUFF_D.1
X0  (via drill 0.35)
  Top 0.152: v22.86,14.92 R41.1 | BUFF_C.18 v23.5,26.67 | BUFF_D.18 70.48,30.48 72.07,30.48 74.77,33.18 v75.09,33.18 | JP1.13 93.66,48.9 95.09,50.32 95.09,55.4 96.52,55.4 97.31,56.2 97.31,60.48 93.34,60.48 88.27,65.56 88.27,67.79 80.96,67.79 79.38,66.2 79.38,62.71 77.15,62.71 76.04,61.59 BUFF_B.18 64.29,61.59 63.34,60.64 47.15,60.64 v46.04,61.75 | v33.66,61.59 BUFF_A.18
  Bottom 0.152: v22.86,14.92 23.5,15.56 23.5,23.5 | v23.5,26.67 23.5,23.5 | BUFF_A.18 22.54,57.47 22.54,25.72 22.23,25.4 22.23,24.77 23.5,23.5 | v75.09,33.18 73.66,34.61 73.66,57.78 BUFF_B.18 | v33.66,61.59 46.04,61.59 v46.04,61.75
X1  (via drill 0.35)
  Top 0.152: v26.67,6.51 R42.1 | v73.03,30.48 BUFF_D.17 | v73.03,48.1 73.34,47.78 95.09,47.78 96.04,48.74 JP1.14 | v27.94,41.75 28.1,41.91 66.36,41.91 67.63,40.64 v73.03,40.64
  Bottom 0.152: v26.67,6.51 24.77,8.41 24.77,25.88 26.19,27.3 BUFF_C.17 28.26,28.89 28.26,41.75 | BUFF_A.17 28.26,57.47 28.26,41.75 | v73.03,30.48 72.71,30.8 72.71,40.64 | 72.71,48.1 72.71,56.2 BUFF_B.17 | 72.71,48.1 72.71,40.64 | 72.71,48.1 v73.03,48.1 | v27.94,41.75 28.26,41.75 | 72.71,40.64 v73.03,40.64
X2  (via drill 0.35)
  Top 0.152: R43.1 30.48,7.78 v29.84,7.78 | v22.86,25.08 23.18,24.77 BUFF_C.16 | BUFF_D.16 70.17,25.08 v72.39,25.08 | v29.84,10.16 30.16,9.84 v50.48,9.84
  Bottom 0.152: v29.84,7.78 v29.84,10.16 29.84,21.59 BUFF_C.16 | BUFF_A.16 22.86,52.7 v22.86,25.08 | BUFF_B.16 72.39,53.98 v72.39,25.08 72.39,24.61 | 72.39,24.61 96.2,24.61 97.31,25.72 97.31,27.15 93.66,27.15 91.28,29.53 91.28,46.2 93.5,46.2 JP1.15 | v50.48,9.84 57.15,3.17 66.83,3.17 66.83,4.6 72.39,10.16 72.39,24.61
X3  (via drill 0.35)
  Top 0.152: v31.91,7.14 R44.1 | v31.91,21.59 31.27,22.23 BUFF_C.15 | BUFF_A.15 27.15,53.5 v28.89,53.5 | v71.44,37.94 71.75,37.62 97.31,37.62 97.31,41.59 96.2,42.7 94.77,42.7 94.77,44.93 96.04,46.2 JP1.16 | v45.09,36.51 45.72,35.88 52.86,35.88 55.09,33.66 v68.42,33.66
  Bottom 0.152: v31.91,7.14 v31.91,21.59 31.27,22.23 31.27,36.51 | v28.89,53.5 31.27,51.12 31.27,36.51 | BUFF_D.15 68.26,23.81 68.26,32.86 68.74,33.34 | 68.74,33.34 69.37,33.97 71.44,33.97 v71.44,37.94 71.44,40.16 68.26,43.34 68.26,44.29 69.37,45.4 71.44,45.4 71.44,52.39 BUFF_B.15 | v45.09,36.51 31.27,36.51 | 68.74,33.34 v68.42,33.66
X4  (via drill 0.35)
  Top 0.152: v29.21,8.57 34.29,8.57 R45.1 | v24.13,20 24.45,19.68 BUFF_C.14 | BUFF_D.14 69.22,20.32 v66.67,20.32 65.41,20.32 v63.82,18.73 | v91.92,39.37 91.12,38.58 69.69,38.58 68.9,37.78 67.79,37.78 67.47,38.1 v66.67,38.1 | v53.66,10.95 v29.21,10.95
  Bottom 0.152: v29.21,8.57 28.26,9.53 28.26,10.95 | 28.26,10.95 28.26,18.1 BUFF_C.14 | BUFF_A.14 24.13,48.9 v24.13,20 | v66.67,20.32 v66.67,38.1 66.67,48.26 BUFF_B.14 | v91.92,39.37 91.92,45.24 92.87,45.24 93.19,44.93 93.19,44.13 93.5,43.81 JP1.17 | v29.21,10.95 28.26,10.95 | v53.66,10.95 60.64,10.95 60.64,17.62 61.75,18.73 v63.82,18.73
X5  (via drill 0.35)
  Top 0.152: v41.91,7.14 R46.1 | v32.54,16.51 31.91,17.14 BUFF_C.13 | BUFF_D.13 68.9,18.1 v67.31,18.1 | BUFF_A.13 27.78,47.78 30,47.78 | 30,47.78 57.63,47.78 59.69,49.85 63.98,49.85 64.93,48.9 BUFF_B.13 | v67.31,37.31 97.63,37.31 97.63,42.23 96.2,43.66 JP1.18 | 30,47.78 v30,48.1
  Bottom 0.152: v32.54,16.51 37.47,11.59 | 37.47,11.59 v41.91,7.14 | v67.31,18.1 v67.31,37.31 67.31,46.35 BUFF_B.13 | 37.47,11.59 32.38,6.51 30.8,6.51 30.8,47.31 v30,48.1
X6  (via drill 0.35)
  Top 0.152: v67.94,41.27 93.5,41.27 JP1.19 | BUFF_C.12 25.08,14.61 25.08,11.59 27.46,9.21 41.27,9.21 R47.1 45.72,4.6 47.78,4.6 48.58,3.81 v57.47,3.81 | BUFF_A.12 27.62,45.4 v28.89,45.4
  Bottom 0.152: 69.06,15.4 67.94,16.51 67.94,33.18 67.79,33.34 67.79,36.83 67.94,36.99 67.94,38.1 67.63,38.42 67.63,41.27 | 69.06,15.4 BUFF_D.12 | 67.63,41.27 67.63,44.13 BUFF_B.12 | 67.63,41.27 v67.94,41.27 | v28.89,45.4 28.57,45.09 28.57,27.15 27.15,25.72 25.08,25.72 25.08,16.19 BUFF_C.12 | v57.47,3.81 69.06,15.4
X7  (via drill 0.35)
  Top 0.152: BUFF_B.11 71.75,41.91 92.87,41.91 93.34,42.39 94.93,42.39 96.04,41.27 JP1.20 | R48.1 55.09,10.32 68.1,10.32 BUFF_D.11 | BUFF_C.11 29.21,9.53 44.77,9.53 R48.1 | R48.1 | BUFF_A.11 27.46,43.02 v29.21,43.02
  Bottom 0.152: v29.21,43.02 30.48,41.75 30.48,7.46 30.16,7.14 26.67,7.14 BUFF_C.11 | BUFF_B.11 72.07,41.59 72.07,32.23 71.75,31.91 71.75,11.27 72.07,10.95 72.07,10.32 71.75,10 69.85,10 BUFF_D.11

## Text on the board
tNames: Register A | Register B | 7 | 7 | 6 | 6 | 5 | 5 | 4 | 4 | 3 | 3 | 2 | 2 | 1 | 1 | 0 | 0 | WR | WR | RD | RD | Register C | Register D | 7 | 7 | 6 | 6 | 5 | 5 | 4 | 4 | 3 | 3 | 2 | 2 | 1 | 1 | 0 | 0 | WR | WR | RD | RD